# EAGLE board interstage_B2 (EAGLE 9.2.2)
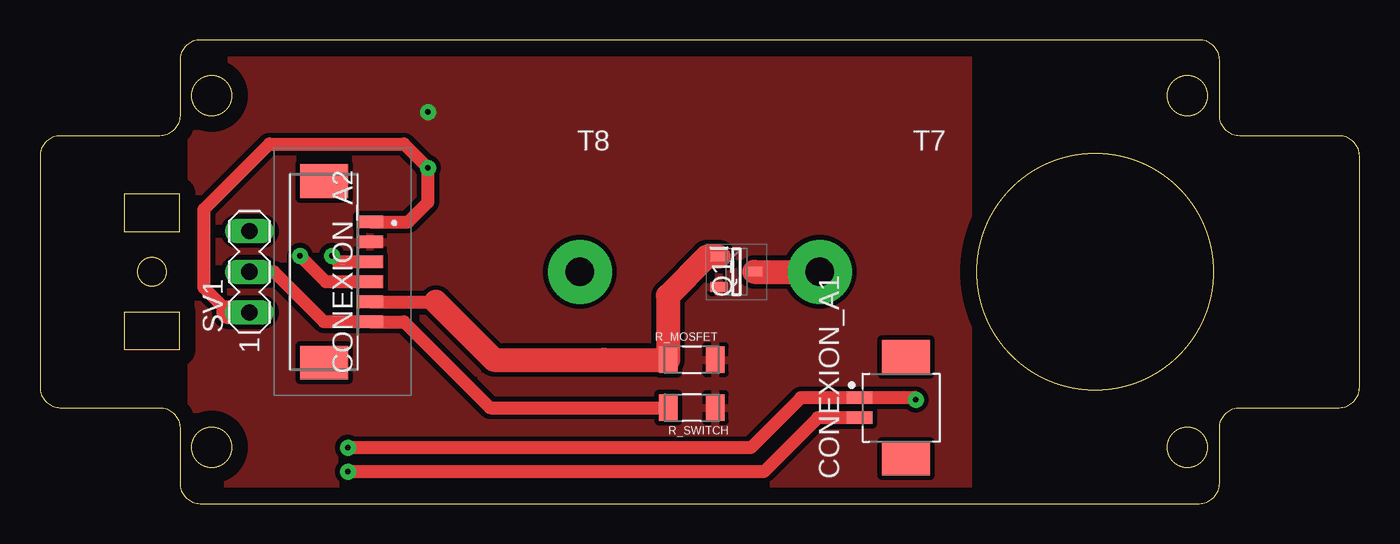
[diagram p0: board, top side]
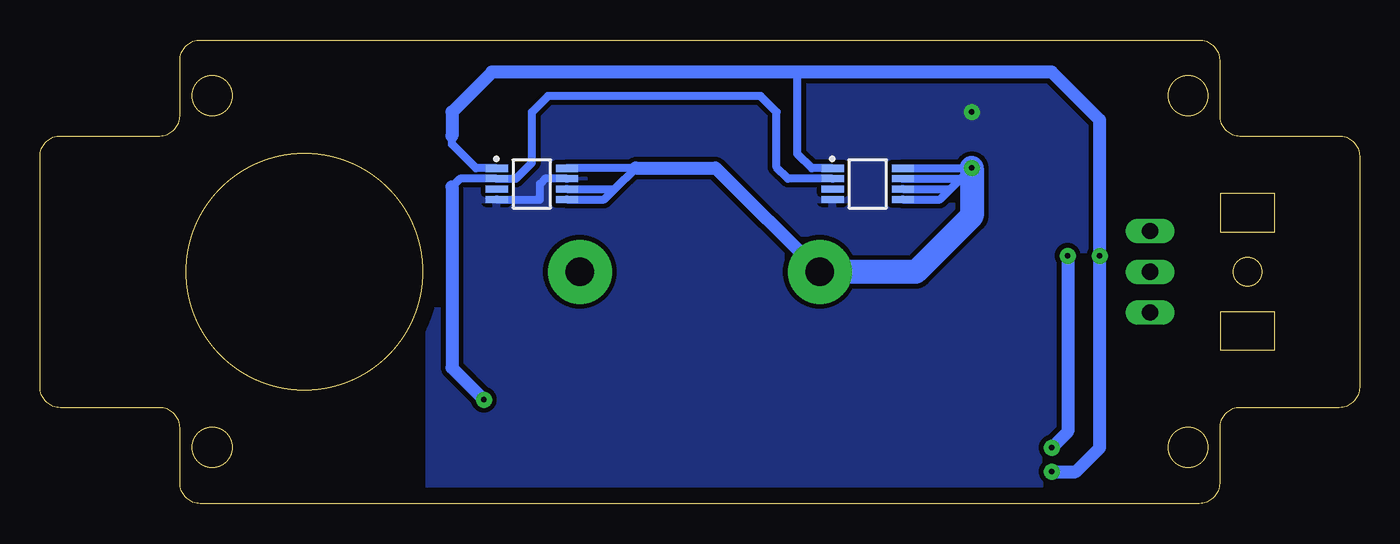
[diagram p1: board, bottom side, seen from below]

Size 82.5 x 29 mm. Coordinates in mm from the lower left corner, seen from the top.
Outline: 5.3,17 5.3,19.4 8.7,19.4 8.7,17 5.3,17
Outline: 5.3,9.6 5.3,12 8.7,12 8.7,9.6 5.3,9.6
Outline: 10.02,0 72.48,0 arc90 73.75,1.27 73.75,4.73 arc-90 75.02,6 81.23,6 arc90 82.5,7.27 82.5,21.73 arc90 81.23,23 75.02,23 arc-90 73.75,24.27 73.75,27.73 arc90 72.48,29 10.02,29 arc90 8.75,27.73 8.75,24.27 arc-90 7.48,23 1.27,23 arc90 0,21.73 0,7.27 arc90 1.27,6 7.48,6 arc-90 8.75,4.73 8.75,1.27 arc90 10.02,0
Outline: circle at 7,14.5 radius 0.9
Outline: circle at 65.97,14.5 radius 7.4
Outline: circle at 10.72,3.52 radius 1.25
Outline: circle at 71.72,25.52 radius 1.25
Outline: circle at 71.72,3.52 radius 1.25
Outline: circle at 10.72,25.52 radius 1.25
Copper layers (1*16): Top 0.035mm / dielectric 1.5mm / Bottom 0.035mm
Design rules "default *": minimum track width 6mil, minimum drill 0.35mm, track to track 0.3mm, track to pad 6mil, pad to pad 6mil, via to via 6mil, smd to smd 6mil, copper to edge 40mil, drill to drill 6mil, minimum pad ring 10mil, minimum via ring 8mil, stop-mask expansion 4mil, vias tented up to drill 0mil, thermal gap 10mil

## Footprints (pad centres in the part's own frame; a part is rotated, then mirrored left to right if it is on the bottom)
MOLEX_0532610271 = smd 0.8 x 1.6: 1 0.625,0; 2 -0.625,0 | smd 2.1 x 3: 3 -3.175,-2.9; 4 3.175,-2.9
532617006 = smd 0.8 x 1.6: 1 3.125,-2.5; 2 1.875,-2.5; 3 0.625,-2.5; 4 -0.625,-2.5; 5 -1.875,-2.5; 6 -3.125,-2.5 | smd 2.1 x 3: MP1 5.675,0.4; MP2 -5.675,0.4
SOT95P230X110-3N = smd 1.05 x 0.6: 1 -1.1,0.95; 2 -1.1,-0.95; 3 1.1,0
RESC3216X70N = smd 1.16 x 1.68: 1 -1.475,0; 2 1.475,0
MA03-1 = drill 1.016 long: 1 -2.54,0; 2 0,0; 3 2.54,0
SOP65P490X110-8N = smd 1.4 x 0.45: 1 -2.2,0.975; 2 -2.2,0.325; 3 -2.2,-0.325; 4 -2.2,-0.975; 5 2.2,-0.975; 6 2.2,-0.325; 7 2.2,0.325; 8 2.2,0.975

## Placement (x,y rotation side)
CONEXION_A1  0532610271  [MOLEX_0532610271]  51.25,6 90 top
CONEXION_A2  53261-7006  [532617006]  18.15,14.5 90 top
Q1  PMV16XNR  [SOT95P230X110-3N]  43.55,14.5 0 top
R_MOSFET  ERA-8AEB331V  [RESC3216X70N]  40.75,9 0 top
R_SWITCH  ERA-8AEB331V  [RESC3216X70N]  40.75,6 180 top
SV1  [MA03-1]  13.1,14.5 90 top
T7  MCP9808T-E/MS  [SOP65P490X110-8N]  51.75,20 0 bottom
T8  MCP9808T-E/MS  [SOP65P490X110-8N]  30.75,20 0 bottom

## Library data of the parts
CONEXION_A1 = picoblade2; AVAILABILITY: Unavailable; DESCRIPTION: Picoblade Connector, 2 Circuit Single Row, Right Angle Surface Mount SMT PCB; DIGIKEY-PURCHASE-URL: https://snapeda.com/shop?store=DigiKey&id=4477935; MF: Molex; MP: 0532610271; PACKAGE: None; PRICE: None
CONEXION_A2 = SamacSys_Parts; DESCRIPTION: 1.25mm Pitch, PicoBlade PCB Header, Single Row, Right-Angle, Surface Mount, Gold (Au) Plating, Friction Lock, Circuits, Tape and Reel; HEIGHT: 3.6mm; MANUFACTURER_NAME: Molex; MANUFACTURER_PART_NUMBER: 53261-7006; MOUSER_PART_NUMBER: 538-53261-7006; MOUSER_PRICE-STOCK: https://www.mouser.co.uk/ProductDetail/Molex/53261-7006?qs=0lSvoLzn4L%2FSBef0BTU2GA%3D%3D
Q1 = SamacSys_Parts; DESCRIPTION: Nexperia PMV16XNR N-channel MOSFET, 8.6 A, 20 V PMV16XN, 3-Pin SOT-23; HEIGHT: 1.1mm; MANUFACTURER_NAME: Nexperia; MANUFACTURER_PART_NUMBER: PMV16XNR; MOUSER_PART_NUMBER: 771-PMV16XNR; MOUSER_PRICE-STOCK: https://www.mouser.com/Search/Refine.aspx?Keyword=771-PMV16XNR
R_MOSFET R_SWITCH = resistor_330_smd; DESCRIPTION: 330 Ohms ±0.1% 0.25W, 1/4W Chip Resistor 1206 (3216 Metric) Automotive AEC-Q200 Thin Film; DIGI-KEY_PART_NUMBER: P330BCCT-ND; MF: Panasonic Electronic; MP: ERA-8AEB331V; PACKAGE: 3216 Panasonic Electronic Components
SV1 = con-lstb; OC_FARNELL: unknown; OC_NEWARK: unknown
T7 T8 = sensorSPEL; DESCRIPTION: Temperature Sensor Digital, Local -40°C ~ 125°C 10 b 8-MSOP; DIGI-KEY_PART_NUMBER: MCP9808T-E/MSCT-ND; MF: Microchip; MP: MCP9808T-E/MS; PACKAGE: MSOP-8 Microchip

## Nets
GND: CONEXION_A2.2 Q1.2 R_MOSFET.2 R_SWITCH.1 T7.4 T7.7 T8.4
INT0: CONEXION_A2.6 R_SWITCH.2 SV1.2
NICROMO: Q1.3
OC1A: CONEXION_A2.5 Q1.1 R_MOSFET.1
SCL: CONEXION_A1.1 CONEXION_A2.3 T7.2 T8.2
SDA: CONEXION_A1.2 CONEXION_A2.4 T7.1 T8.1
VCC: CONEXION_A2.1 SV1.1 T7.5 T7.6 T7.8 T8.5 T8.6 T8.7 T8.8

## Tracks (layer width: path | path; a pad name or v marks a point on that pad's centre or on a via)
GND  (via drill 0.35 pad 1)
  Bottom 0.5: T7.7 50.92,20.32 51.25,20 51.25,19 51.27,19.02 T7.4
  other vias: 24.25,24.5
  pour Top: 9.45,28 9.45,0.6 58.05,0.6 58.05,28.1 57.95,28
  pour Bottom: 9.45,28 9.45,0.5 9.55,0.4 58.15,0.4 58.15,28
INT0
  Top 0.5: 14.62,14.5 SV1.2
  Top 0.8: 14.62,14.5 17.75,11.38 CONEXION_A2.6 22.75,11.38 28.12,6 R_SWITCH.2
NICROMO  (via drill 1.8 pad 4)
  Top 1.5: Q1.3 v48.75,14.5
OC1A
  Top 0.5: R_MOSFET.1 39.25,9.03
  Top 0.8: CONEXION_A2.5 24.75,12.62
  Top 1.5: 39.25,9.03 39.25,13 41.7,15.45 Q1.1 | 24.75,12.62 28.38,9 35.25,9 R_MOSFET.1
SCL  (via drill 0.35 pad 1)
  Top 0.8: v54.75,6.5 54.75,6.62 CONEXION_A1.1 47.58,6.62 44.45,3.5 v19.25,3.5 | CONEXION_A2.3 18.62,15.12 v18.25,15.5
  Bottom 0.5: T8.2 35.75,20.32 36.45,21.02 36.45,24.5 37.45,25.5 50.75,25.5 51.75,24.5 51.75,21.32 52.75,20.32 T7.2 56.25,20.32 56.75,19.82
  Bottom 0.8: 56.75,19.82 56.75,8.5 v54.75,6.5 | v18.25,15.5 18.25,4.5 v19.25,3.5
SDA  (via drill 0.35 pad 1)
  Top 0.8: CONEXION_A1.2 48.62,5.38 45.25,2 v19.25,2 | CONEXION_A2.4 17.88,13.88 v16.25,15.5
  Bottom 0.5: T8.1 34.25,20.98 35.15,21.88 35.15,27 | T7.1 55.25,20.98 56.75,22.48 56.75,23
  Bottom 0.8: 56.75,23 56.75,24.5 54.25,27 35.15,27 19.25,27 16.25,24 v16.25,15.5 16.25,3.5 17.75,2 v19.25,2
VCC  (via drill 0.35 pad 1, 1.8 pad 4)
  Top 0.8: CONEXION_A2.1 23.02,17.62 24.25,18.85 v24.25,21 22.75,22.5 14.33,22.5 10.25,18.42 10.25,13.5 11.79,11.96
  Top 1.5: SV1.1 11.79,11.96
  Bottom 0.5: T8.5 26.23,19.02 25.57,19.68 | T8.8 24.25,20.98 v24.25,21 24.93,20.32 | 24.93,20.32 25.57,19.68 | T8.7 24.93,20.32 | T8.6 25.57,19.68 | T7.8 49.52,21 45.25,21 46.58,19.68 | T7.6 46.58,19.68 | T7.5 47.23,19.02 46.58,19.68
  Bottom 0.8: 45.25,21 40.28,21 v33.75,14.5
  Bottom 1.5: v24.25,21 24.25,18 27.75,14.5 v33.75,14.5